# EAGLE board board1 (EAGLE 6.1)
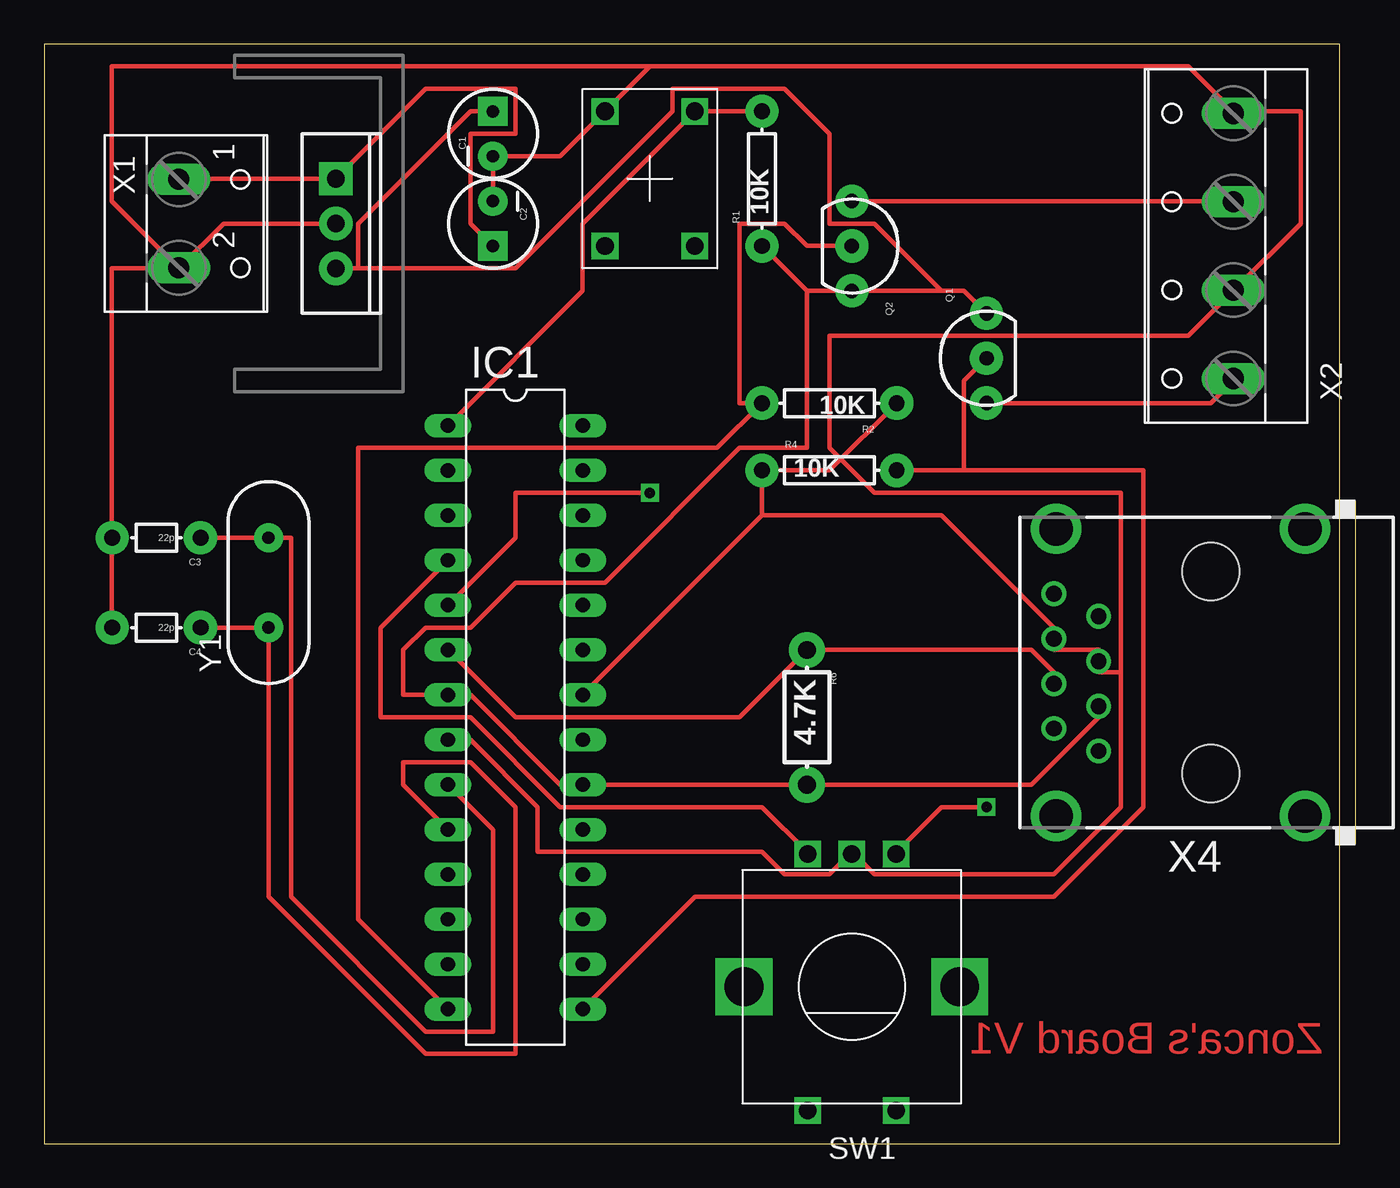
[diagram p0: board, top side]
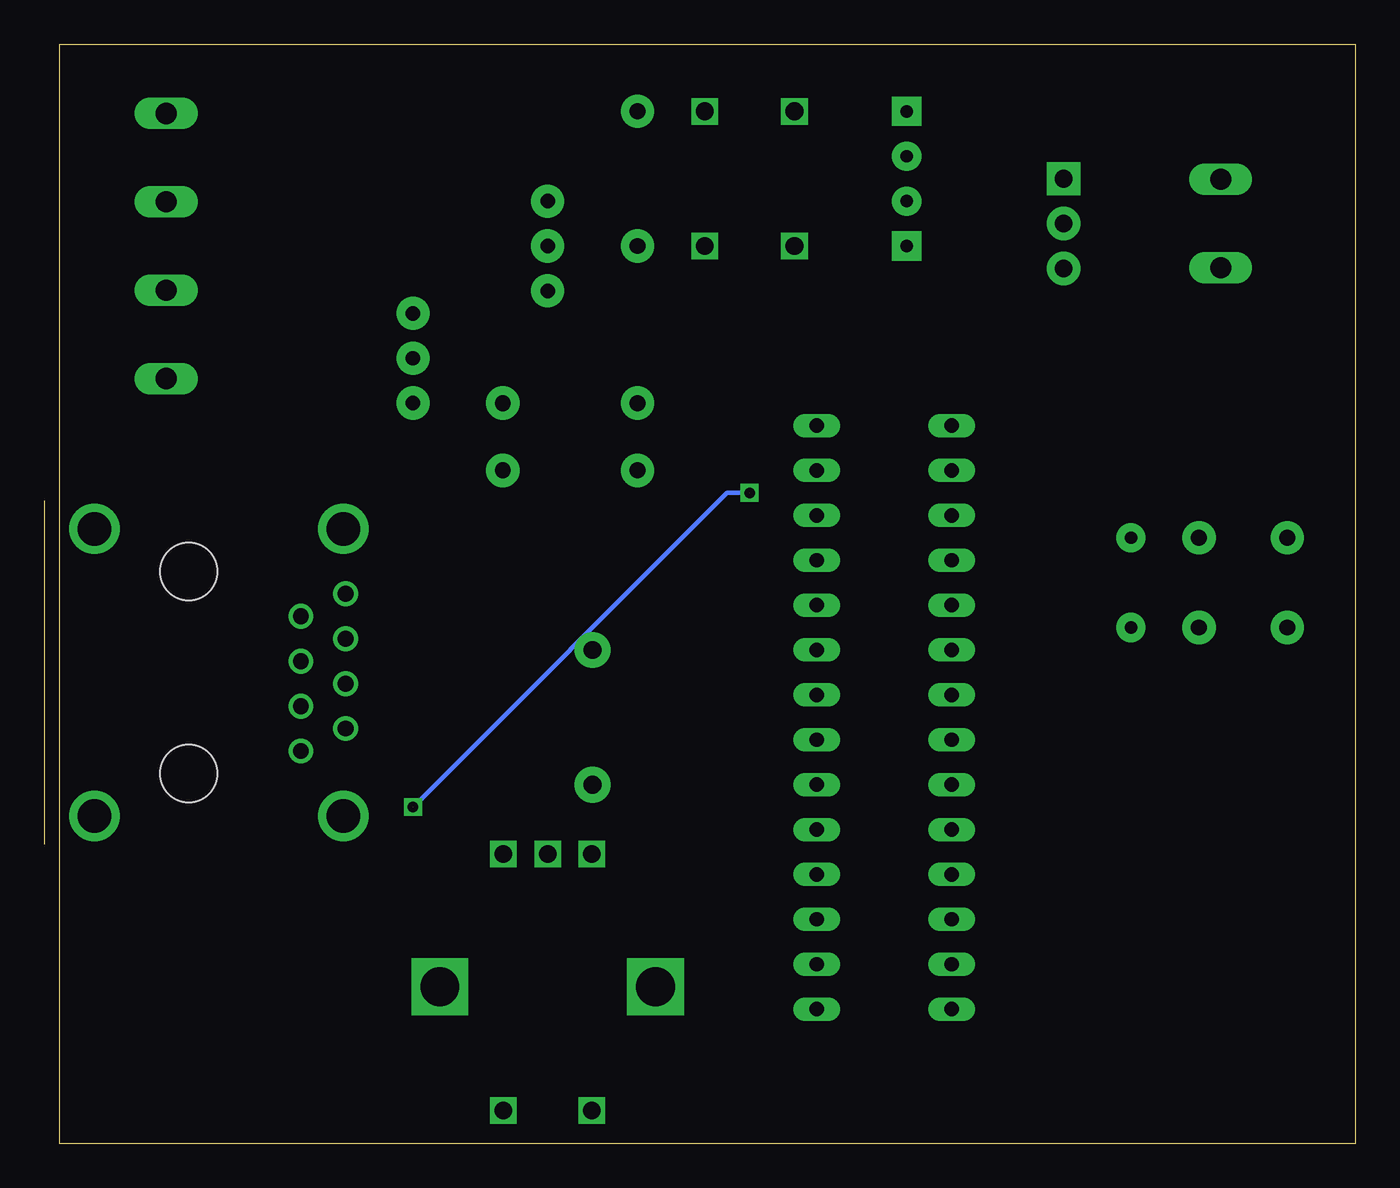
[diagram p1: board, bottom side, seen from below]

Size 73.33 x 62.22 mm. Coordinates in mm from the lower left corner, seen from the top.
Outline: 0,0 73.33,0 73.33,62.22 0,62.22 0,0
Copper layers (1*16): Top 0.035mm / dielectric 1.5mm / Bottom 0.035mm
Design rules: minimum track width 15mil, minimum drill 24mil, track to track 10mil, track to pad 10mil, pad to pad 10mil, via to via 10mil, smd to smd 8mil, copper to edge 40mil, drill to drill 8mil, minimum pad ring 10mil, minimum via ring 8mil, stop-mask expansion 4mil, vias tented up to drill 0mil, thermal gap 10mil

## Footprints (pad centres in the part's own frame; a part is rotated, then mirrored left to right if it is on the bottom)
CPOL-RADIAL-10UF-25V = drill 0.7 pad 1.651 square: 1 1.27,0 | drill 0.7 pad 1.651: 2 -1.27,0
AXIAL-5MM = drill 0.9 pad 1.88: P$1 -2.5,0; P$2 2.5,0
DIL28-3 = drill 0.813 long: 1 -16.51,-3.81; 2 -13.97,-3.81; 3 -11.43,-3.81; 4 -8.89,-3.81; 5 -6.35,-3.81; 6 -3.81,-3.81; 7 -1.27,-3.81; 8 1.27,-3.81; 9 3.81,-3.81; 10 6.35,-3.81; 11 8.89,-3.81; 12 11.43,-3.81; 13 13.97,-3.81; 14 16.51,-3.81; 15 16.51,3.81; 16 13.97,3.81; 17 11.43,3.81; 18 8.89,3.81; 19 6.35,3.81; 20 3.81,3.81; 21 1.27,3.81; 22 -1.27,3.81; 23 -3.81,3.81; 24 -6.35,3.81; 25 -8.89,3.81; 26 -11.43,3.81; 27 -13.97,3.81; 28 -16.51,3.81
TO220-IGO = drill 1 pad 1.88: GND 0,0; OUT 2.54,0 | drill 1 pad 1.88 square: IN -2.54,0
TO-92-AMMO = drill 0.813 pad 1.88: 1 -2.54,0; 2 0,0; 3 2.54,0
AXIAL-0.3 = drill 0.9 pad 1.88: P$1 -3.81,0; P$2 3.81,0
AXIAL-0.3-KIT = drill 1.016 pad 2.032: P$1 -3.81,0; P$2 3.81,0
KSA_SEALED_TAC_SWITCH = drill 1 square: P$1 -3.81,2.54; P$2 3.81,2.54; P$3 -3.81,-2.54; P$4 3.81,-2.54
ALPS_EC12E_SW = drill 1 square: A -2.5,-7.5; B 2.5,-7.5; C 0,-7.5; D -2.5,7; E 2.5,7 | drill 2.2 square: GND1 -6.1,0; GND2 6.1,0
W237-102 = drill 1.194 long: 1 -2.5,-1.27; 2 2.5,-1.27
W237-4 = drill 1.194 long: 1 -7.5,-1.27; 2 -2.5,-1.27; 3 2.5,-1.27; 4 7.5,-1.27
RJ45-SHIELD2 = drill 0.9 pad 1.4: 1 -4.445,6.35; 2 -3.175,8.89; 3 -1.905,6.35; 4 -0.635,8.89; 5 0.635,6.35; 6 1.905,8.89; 7 3.175,6.35; 8 4.445,8.89 | drill 1.9 pad 2.5: S1 -8.128,-5.33; S2 8.128,-5.33; S3 -8.128,8.76; S4 8.128,8.76 | hole 3.251: -5.715,0; 5.715,0
HC49US = drill 0.7 pad 1.651: 1 -2.54,0; 2 2.54,0

## Placement (x,y rotation side)
C1  10uf  [CPOL-RADIAL-10UF-25V]  25.4,57.15 90 top
C2  10uf  [CPOL-RADIAL-10UF-25V]  25.4,52.07 270 top
C3  22p  [AXIAL-5MM]  6.35,34.29 180 top
C4  22p  [AXIAL-5MM]  6.35,29.21 180 top
IC1  MEGA8-P  [DIL28-3]  26.67,24.13 270 top
IC3  [TO220-IGO]  16.51,52.07 270 top
Q1  2n3904  [TO-92-AMMO]  53.34,44.45 90 top
Q2  2n3904  [TO-92-AMMO]  45.72,50.8 270 top
R1  10K  [AXIAL-0.3]  40.64,54.61 90 top
R2  10K  [AXIAL-0.3]  44.45,41.91 180 top
R4  10K  [AXIAL-0.3]  44.45,38.1 0 top
R6  4.7K  [AXIAL-0.3-KIT]  43.18,24.13 270 top
S1  [KSA_SEALED_TAC_SWITCH]  34.29,54.61 90 top
SW1  EC12E_SW  [ALPS_EC12E_SW]  45.72,8.89 180 top
X1  [W237-102]  8.89,52.07 270 top
X2  [W237-4]  66.04,50.8 90 top
X4  RJ45-6L2-B  [RJ45-SHIELD2]  66.04,26.67 90 top
Y1  16mhz  [HC49US]  12.7,31.75 90 top

## Library data of the parts
C1-C4 IC3 Q1 Q2 R1 R2 R4 R6 S1 Y1 = SparkFun
IC1 = atmel; OC_FARNELL: unknown; OC_NEWARK: unknown
SW1 = switch-alps; MPN: EC12E2424407; OC_FARNELL: 1520813; OC_NEWARK: 74M1068
X1 = con-wago-500; MPN: 237-102; OC_FARNELL: unknown; OC_NEWARK: 70K9898
X2 = con-wago-500; OC_FARNELL: unknown; OC_NEWARK: unknown
X4 = con-tycoelectronics; MPN: RJ45-6L2-B; OC_FARNELL: unknown; OC_NEWARK: 16R6096

## Nets
5V: C1.1 IC1.7 IC1.20 IC3.OUT Q1.3 Q2.3 R1.P$1 R6.P$2 X4.3
DALLASONEWIREBUS: IC1.6 R6.P$1 X4.4
GND: C1.2 C2.2 C3.P$2 C4.P$2 IC1.8 IC1.22 IC3.GND R2.P$1 R4.P$1 S1.P$2 SW1.C X1.2 X2.2 X2.4 X4.5 X4.6
N$1: IC1.1 R1.P$2 S1.P$4
N$2: C2.1 IC3.IN X1.1
N$3: C3.P$1 IC1.9 Y1.2
N$4: C4.P$1 IC1.10 Y1.1
N$5: IC1.4 SW1.B
N$6: IC1.23
N$7: IC1.5 SW1.A
N$14: IC1.15 Q1.2 R4.P$2
N$26: IC1.21
N$28: Q2.1 X2.3
N$30: Q1.1 X2.1
N$31: IC1.14 Q2.2 R2.P$2

## Tracks (layer width: path | path; a pad name or v marks a point on that pad's centre or on a via)
5V
  Top 0.254: C1.1 24.13,58.42 17.78,52.07 17.78,49.53 | IC3.OUT 17.78,49.53 | Q1.3 52.07,48.26 50.8,48.26 | 50.8,48.26 Q2.3 43.18,48.26 | 43.18,48.26 R1.P$1 | X4.3 59.69,24.13 55.88,20.32 R6.P$2 IC1.20 29.21,20.32 24.13,25.4 IC1.7 20.32,25.4 20.32,27.94 21.59,29.21 24.13,29.21 26.67,31.75 31.75,31.75 39.37,39.37 43.18,39.37 43.18,48.26 | 17.78,49.53 26.67,49.53 35.56,58.42 35.56,59.69 41.91,59.69 44.45,57.15 44.45,52.07 46.99,52.07 50.8,48.26
DALLASONEWIREBUS
  Top 0.254: IC1.6 26.67,24.13 39.37,24.13 R6.P$1 55.88,27.94 57.15,26.67 X4.4
GND
  Top 0.254: IC1.8 24.13,22.86 27.94,19.05 27.94,16.51 40.64,16.51 41.91,15.24 44.45,15.24 45.72,16.51 | 40.64,35.56 IC1.22 | 40.64,35.56 R4.P$1 44.45,38.1 R2.P$1 | 40.64,35.56 50.8,35.56 57.15,29.21 X4.6 57.15,27.94 59.69,27.94 X4.5 59.69,26.67 60.96,26.67 | 45.72,16.51 46.99,15.24 57.15,15.24 60.96,19.05 60.96,26.67 | 45.72,16.51 SW1.C | 3.81,34.29 3.81,29.21 C4.P$2 | 7.62,49.53 10.16,52.07 IC3.GND | 3.81,34.29 3.81,49.53 7.62,49.53 | 3.81,34.29 C3.P$2 | C2.2 C1.2 29.21,55.88 S1.P$2 34.29,60.96 | 67.31,48.26 71.12,52.07 71.12,58.42 67.31,58.42 | 34.29,60.96 64.77,60.96 67.31,58.42 | 67.31,58.42 X2.4 | 7.62,49.53 3.81,53.34 3.81,60.96 34.29,60.96 | 7.62,49.53 X1.2 | 60.96,26.67 60.96,36.83 46.99,36.83 44.45,39.37 44.45,45.72 64.77,45.72 67.31,48.26 | 67.31,48.26 X2.2
N$1
  Top 0.254: IC1.1 30.48,48.26 30.48,52.07 S1.P$4 R1.P$2
N$2
  Top 0.254: C2.1 24.13,52.07 24.13,57.15 26.67,57.15 26.67,59.69 21.59,59.69 IC3.IN 7.62,54.61 X1.1
N$3
  Top 0.254: IC1.9 25.4,17.78 25.4,6.35 21.59,6.35 13.97,13.97 13.97,34.29 Y1.2 C3.P$1
N$4
  Top 0.254: IC1.10 20.32,20.32 20.32,21.59 24.13,21.59 26.67,19.05 26.67,5.08 21.59,5.08 12.7,13.97 Y1.1 C4.P$1
N$5
  Top 0.254: IC1.4 19.05,29.21 19.05,24.13 24.13,24.13 29.21,19.05 40.64,19.05 43.18,16.51 SW1.B
N$7  (via drill 0.6)  (2 unrouted)
  Top 0.254: IC1.5 26.67,34.29 26.67,36.83 v34.29,36.83 | v53.34,19.05 50.8,19.05 48.26,16.51 SW1.A
  Bottom 0.254: v34.29,36.83 35.56,36.83 v53.34,19.05
N$14
  Top 0.254: IC1.15 36.83,13.97 57.15,13.97 62.23,19.05 62.23,38.1 52.07,38.1 | R4.P$2 52.07,38.1 | Q1.2 52.07,43.18 52.07,38.1
N$28
  Top 0.254: Q2.1 67.31,53.34 X2.3
N$30
  Top 0.254: Q1.1 66.04,41.91 67.31,43.18 X2.1
N$31
  Top 0.254: IC1.14 17.78,12.7 17.78,39.37 38.1,39.37 R2.P$2 39.37,41.91 39.37,52.07 41.91,52.07 43.18,50.8 Q2.2

## Text on the board
Top: Zonca's Board V1